# EAGLE board STM32VGT ATAS v10 (EAGLE 9.7.0)
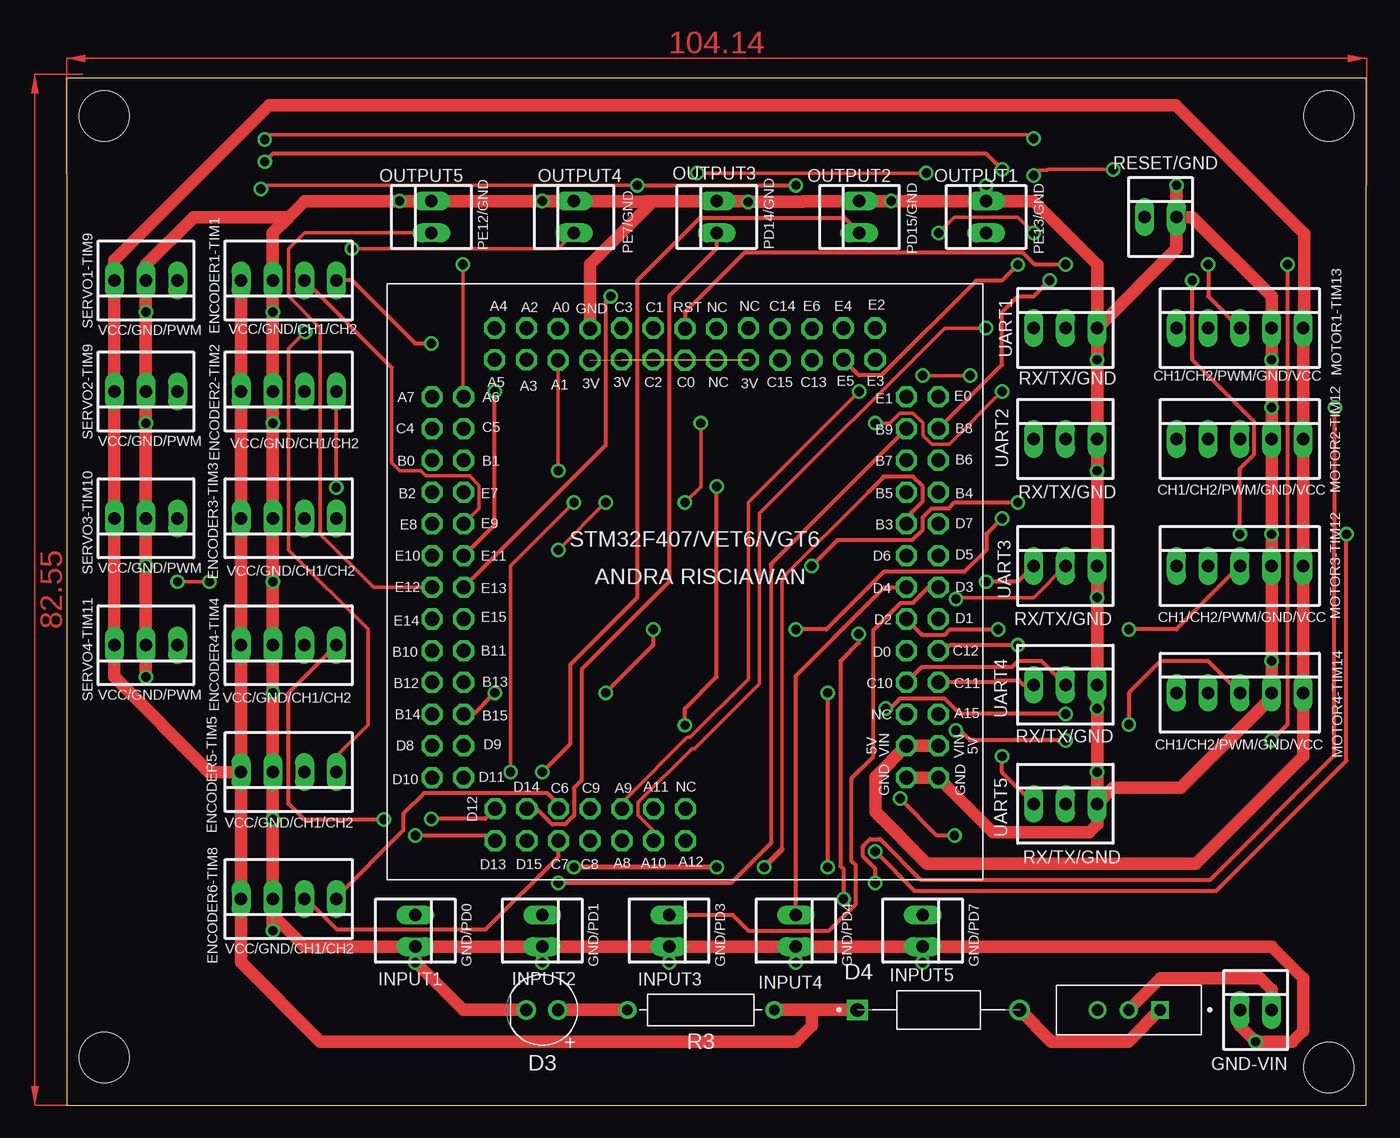
[diagram p0: board, top side]
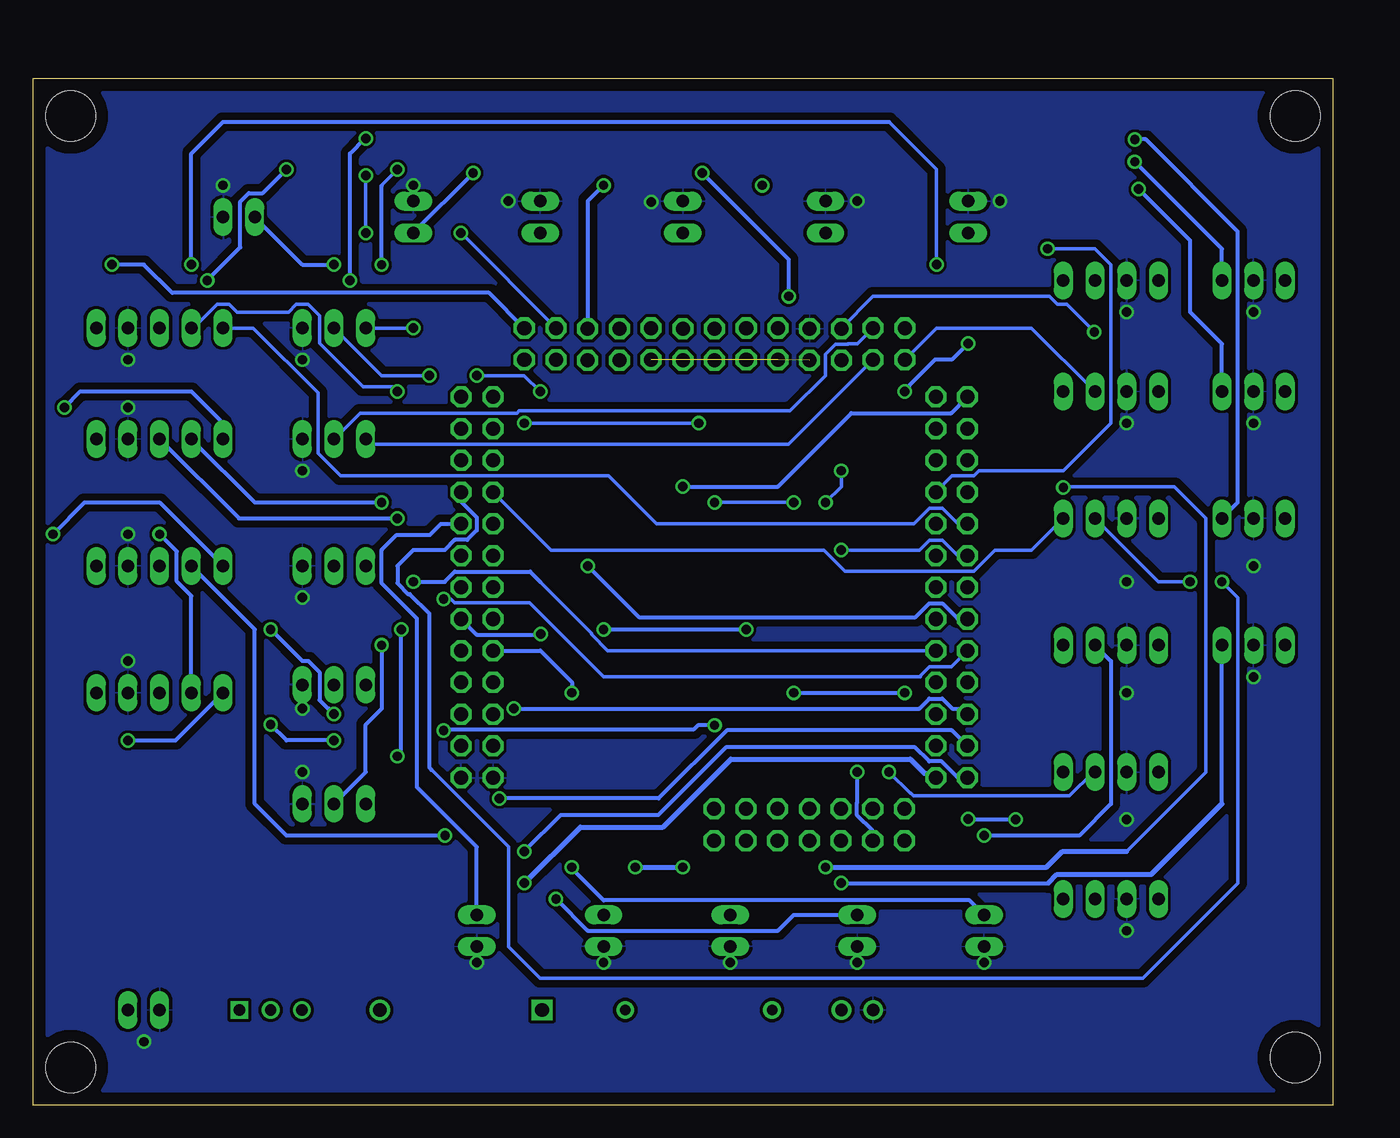
[diagram p1: board, bottom side, seen from below]

Size 104.12 x 82.22 mm. Coordinates in mm from the lower left corner, seen from the top.
Outline: 0,0 104.12,0 104.12,82.22 0,82.22 0,0
Copper layers (1*16): Top / Bottom
Stack-up Default Layer Stack: Top SilkScreen Epoxy Ink / Top SolderMask SR:Green 0.0254mm Dk 4.3 / Top Surface Finish Lead-Free 0.02mm / Top CuFoil:007 0.035mm / Dielectric-1 User Defined 1.5mm / Bottom CuFoil:007 0.035mm / Bottom Surface Finish Lead-Free 0.02mm / Bottom SolderMask SR:Green 0.0254mm Dk 4.3 / Bottom SilkScreen Epoxy Ink
Design rules: minimum copper width 0.3mm, minimum drill size 0.75mm, copper clearance wire_polygon to wire_polygon 0.6mm, copper clearance wire_polygon to pad_smd 0.25mm, copper clearance wire_polygon to via 0.25mm, copper clearance pad_smd to pad_smd 0.25mm, copper clearance pad_smd to via 0.25mm, copper clearance via to via 6mil, copper clearance smd to pad (same net) 6mil, copper clearance smd to via (same net) 6mil, copper clearance smd to smd (same net) 6mil, dimension clearance 40mil, via restrict clearance 0mil, restrict clearance 0.3mm, drill distance 0.6mm, keepout clearance 0mil
Holes 4 mm at 3.02,3.81 101.1,3.02 101.1,79.2 3.02,79.2

## Footprints (pad centres in the part's own frame; a part is rotated, then mirrored left to right if it is on the bottom)
LEDRD254W60D565H860B_R = drill 0.981 pad 1.581: A -1.27,0; C 1.27,0
DIOAD1300W80L670D310 = drill 1.1: A 6.5,0 | drill 1.1 square: C -6.5,0
22-23-2041 = drill 1 long: 1 -3.81,0; 2 -1.27,0; 3 1.27,0; 4 3.81,0
22-23-2021 = drill 1 long: 1 -1.27,0; 2 1.27,0
22-23-2051 = drill 1 long: 1 -5.08,0; 2 -2.54,0; 3 0,0; 4 2.54,0; 5 5.08,0
RESAD1176W63L850D250B = drill 0.83 pad 1.43: 1 -5.88,0; 2 5.88,0
SW_MINI-SPDT-SW = drill 0.9 square: 1 -2.5,0 | drill 0.9: 2 0,0; 3 2.5,0
22-23-2031 = drill 1 long: 1 -2.54,0; 2 0,0; 3 2.54,0
STM32F4HEAD = drill 1.125 octagon: 3V1 5.08,20.32; 3V2 -5.08,20.32; 3V3 -7.62,20.27; 5V1 17.75,-10.6; 5V2 20.29,-10.6; A0 -10.16,22.81; A1 -10.16,20.27; A2 -12.7,22.86; A3 -12.7,20.32; A4 -15.24,22.86; A5 -15.24,20.32; A6 -17.72,17.34; A7 -20.26,17.34; A8 -5.05,-18.19; A9 -5.05,-15.65; A10 -2.51,-18.19; A11 -2.51,-15.65; A12 0.03,-18.19; A15 20.29,-8.06; B0 -20.26,12.26; B1 -17.72,12.26; B2 -20.26,9.72; B3 17.75,7.18; B4 20.29,9.72; B5 17.75,9.72; B6 20.29,12.26; B7 17.75,12.26; B8 20.29,14.8; B9 17.75,14.8; B10 -20.26,-2.98; B11 -17.72,-2.98; B12 -20.26,-5.52; B13 -17.72,-5.52; B14 -20.26,-8.06; B15 -17.72,-8.06; C0 0,20.27; C1 -2.54,22.86; C2 -2.54,20.32; C3 -5.08,22.86; C4 -20.26,14.8; C5 -17.72,14.8; C6 -10.13,-15.65; C7 -10.13,-18.19; C8 -7.59,-18.19; C9 -7.59,-15.65; C10 17.75,-5.52; C11 20.29,-5.52; C12 20.29,-2.98; C13 10.16,20.27; C14 7.62,22.81; C15 7.62,20.27; D0 17.75,-2.98; D1 20.29,-0.44; D2 17.75,-0.44; D3 20.29,2.1; D4 17.75,2.1; D5 20.29,4.64; D6 17.75,4.64; D7 20.29,7.18; D8 -20.26,-10.6; D9 -17.72,-10.6; D10 -20.26,-13.14; D11 -17.72,-13.14; D12 -15.21,-15.65; D13 -15.21,-18.19; D14 -12.67,-15.65; D15 -12.67,-18.19; E0 20.29,17.34; E1 17.75,17.34; E2 15.24,22.86; E3 15.24,20.32; E4 12.7,22.86; E5 12.7,20.32; E6 10.16,22.81; E7 -17.72,9.72; E8 -20.26,7.18; E9 -17.72,7.18; E10 -20.26,4.64; E11 -17.72,4.64; E12 -20.26,2.1; E13 -17.72,2.1; E14 -20.26,-0.44; E15 -17.72,-0.44; GND1 17.75,-13.14; GND2 20.29,-13.14; GND3 -7.62,22.81; NC2 0.03,-15.65; NC3 17.75,-8.06; NC4 5.08,22.86; NC5 2.54,20.27; NC6 2.54,22.81; RST 0,22.81

## Placement (x,y rotation side)
D3  LED_RADIALRED  [LEDRD254W60D565H860B_R]  38.1,7.62 180 top
D4  1N5392  [DIOAD1300W80L670D310]  69.85,7.62 0 top
ENCODER1-TIM1  22-23-2041  [22-23-2041]  17.78,66.04 180 top
ENCODER2-TIM2  22-23-2041  [22-23-2041]  17.78,57.15 180 top
ENCODER3-TIM3  22-23-2041  [22-23-2041]  17.78,46.99 180 top
ENCODER4-TIM4  22-23-2041  [22-23-2041]  17.78,36.83 180 top
ENCODER5-TIM5  22-23-2041  [22-23-2041]  17.78,26.67 180 top
ENCODER6-TIM8  22-23-2041  [22-23-2041]  17.78,16.51 180 top
GND-VIN  22-23-2021  [22-23-2021]  95.25,7.62 0 top
INPUT1  22-23-2021  [22-23-2021]  27.94,13.97 270 top
INPUT2  22-23-2021  [22-23-2021]  38.1,13.97 270 top
INPUT3  22-23-2021  [22-23-2021]  48.26,13.97 270 top
INPUT4  22-23-2021  [22-23-2021]  58.42,13.97 270 top
INPUT5  22-23-2021  [22-23-2021]  68.58,13.97 270 top
MOTOR1-TIM13  22-23-2051  [22-23-2051]  93.98,62.23 0 top
MOTOR2-TIM12  22-23-2051  [22-23-2051]  93.98,53.34 0 top
MOTOR3-TIM12  22-23-2051  [22-23-2051]  93.98,43.18 0 top
MOTOR4-TIM14  22-23-2051  [22-23-2051]  93.98,33.02 0 top
OUTPUT1  22-23-2021  [22-23-2021]  73.66,71.12 90 top
OUTPUT2  22-23-2021  [22-23-2021]  63.5,71.12 90 top
OUTPUT3  22-23-2021  [22-23-2021]  52.07,71.12 90 top
OUTPUT4  22-23-2021  [22-23-2021]  40.64,71.12 90 top
OUTPUT5  22-23-2021  [22-23-2021]  29.21,71.12 90 top
R3  [RESAD1176W63L850D250B]  50.8,7.62 180 top
RESET/GND  22-23-2021  [22-23-2021]  87.63,71.12 0 top
S1  MINI-SPDT-SW  [SW_MINI-SPDT-SW]  85.09,7.62 180 top
SERVO1-TIM9  22-23-2031  [22-23-2031]  6.35,66.04 180 top
SERVO2-TIM9  22-23-2031  [22-23-2031]  6.35,57.15 180 top
SERVO3-TIM10  22-23-2031  [22-23-2031]  6.35,46.99 180 top
SERVO4-TIM11  22-23-2031  [22-23-2031]  6.35,36.83 180 top
U$1  [STM32F4HEAD]  49.53,39.37 0 top
UART1  22-23-2031  [22-23-2031]  80.01,62.23 0 top
UART2  22-23-2031  [22-23-2031]  80.01,53.34 0 top
UART3  22-23-2031  [22-23-2031]  80.01,43.18 0 top
UART4  22-23-2031  [22-23-2031]  80.01,33.66 0 top
UART5  22-23-2031  [22-23-2031]  80.01,24.13 0 top

## Library data of the parts
D3 = Opto-Electronic
D4 = 1N5392; AVAILABILITY: In Stock; CHECK_PRICES: https://www.snapeda.com/parts/1N5392/Onsemi/view-part/?ref=eda; DESCRIPTION: Diode 100 V 1.5A Through Hole DO-15; MF: onsemi; MP: 1N5392; PACKAGE: None; PRICE: None; SNAPEDA_LINK: https://www.snapeda.com/parts/1N5392/Onsemi/view-part/?ref=snap
ENCODER1-TIM1 ENCODER2-TIM2 ENCODER3-TIM3 ENCODER4-TIM4 ENCODER5-TIM5 ENCODER6-TIM8 = con-molex; MF: MOLEX; MPN: 22-23-2041; OC_FARNELL: 1462920; OC_NEWARK: 38C0355
GND-VIN INPUT1-INPUT5 OUTPUT1-OUTPUT5 RESET/GND = con-molex; MF: MOLEX; MPN: 22-23-2021; OC_FARNELL: 1462926; OC_NEWARK: 25C3832
MOTOR1-TIM13 MOTOR2-TIM12 MOTOR3-TIM12 MOTOR4-TIM14 = con-molex; MF: MOLEX; MPN: 22-23-2051; OC_FARNELL: 1462952; OC_NEWARK: 38C9178
R3 = Resistor; CATEGORY: Resistor; SUB-CATEGORY: Fixed
S1 = MINI-SPDT-SW; AVAILABILITY: Not in stock; CHECK_PRICES: https://www.snapeda.com/parts/MINI-SPDT-SW/Gravitech/view-part/?ref=eda; DESCRIPTION: Slide Switches MINI SPDT SWITCH; MF: Gravitech; MP: MINI-SPDT-SW; PACKAGE: None; PRICE: None; SNAPEDA_LINK: https://www.snapeda.com/parts/MINI-SPDT-SW/Gravitech/view-part/?ref=snap
SERVO1-TIM9 SERVO2-TIM9 SERVO3-TIM10 SERVO4-TIM11 UART1-UART5 = con-molex; MF: MOLEX; MPN: 22-23-2031; OC_FARNELL: 1462950; OC_NEWARK: 30C0862
U$1 = stm32header

## Nets
3V3: U$1.3V1 U$1.3V2 U$1.3V3
5V: D4.C ENCODER1-TIM1.4 ENCODER2-TIM2.4 ENCODER3-TIM3.4 ENCODER4-TIM4.4 ENCODER5-TIM5.4 ENCODER6-TIM8.4 MOTOR1-TIM13.5 MOTOR2-TIM12.5 MOTOR3-TIM12.5 MOTOR4-TIM14.5 R3.1 SERVO1-TIM9.3 SERVO2-TIM9.3 SERVO3-TIM10.3 SERVO4-TIM11.3 U$1.5V1 U$1.5V2
GND: D3.C ENCODER1-TIM1.3 ENCODER2-TIM2.3 ENCODER3-TIM3.3 ENCODER4-TIM4.3 ENCODER5-TIM5.3 ENCODER6-TIM8.3 GND-VIN.1 INPUT1.2 INPUT2.2 INPUT3.2 INPUT4.2 INPUT5.2 MOTOR1-TIM13.4 MOTOR2-TIM12.4 MOTOR3-TIM12.4 MOTOR4-TIM14.4 OUTPUT1.2 OUTPUT2.2 OUTPUT3.2 OUTPUT4.2 OUTPUT5.2 RESET/GND.2 SERVO1-TIM9.2 SERVO2-TIM9.2 SERVO3-TIM10.2 SERVO4-TIM11.2 U$1.GND1 U$1.GND2 U$1.GND3 UART1.3 UART2.3 UART3.3 UART4.3 UART5.3
N$4: D4.A S1.1
N$5: GND-VIN.2 S1.2
N$8: D3.A R3.2
PA0: ENCODER5-TIM5.1 U$1.A0
PA1: ENCODER5-TIM5.2 U$1.A1
PA2: U$1.A2 UART2.2
PA3: U$1.A3 UART2.1
PA4: U$1.A4
PA5: ENCODER2-TIM2.2 U$1.A5
PA6: MOTOR1-TIM13.3 U$1.A6
PA7: MOTOR4-TIM14.3 U$1.A7
PA8: U$1.A8
PA9: U$1.A9 UART1.2
PA10: U$1.A10 UART1.1
PA11: U$1.A11
PA12: U$1.A12
PA15: U$1.A15
PB0: U$1.B0
PB1: U$1.B1
PB2: U$1.B2
PB3: ENCODER2-TIM2.1 U$1.B3
PB4: ENCODER3-TIM3.2 U$1.B4
PB5: ENCODER3-TIM3.1 U$1.B5
PB6: U$1.B6
PB7: U$1.B7
PB8: SERVO3-TIM10.1 U$1.B8
PB9: SERVO4-TIM11.1 U$1.B9
PB10: U$1.B10 UART3.2
PB11: U$1.B11 UART3.1
PB12: U$1.B12
PB13: U$1.B13
PB14: MOTOR3-TIM12.3 U$1.B14
PB15: MOTOR2-TIM12.3 U$1.B15
PC0: U$1.C0
PC1: U$1.C1
PC2: U$1.C2
PC3: U$1.C3
PC4: U$1.C4
PC5: U$1.C5
PC6: ENCODER6-TIM8.1 U$1.C6
PC7: ENCODER6-TIM8.2 U$1.C7
PC8: U$1.C8
PC9: U$1.C9
PC10: U$1.C10 UART4.2
PC11: U$1.C11 UART4.1
PC12: U$1.C12 UART5.2
PC13: U$1.C13
PC14: U$1.C14
PC15: U$1.C15
PD0: INPUT1.1 U$1.D0
PD1: INPUT2.1 U$1.D1
PD2: U$1.D2 UART5.1
PD3: INPUT3.1 U$1.D3
PD4: INPUT4.1 U$1.D4
PD5: U$1.D5
PD6: U$1.D6
PD7: INPUT5.1 U$1.D7
PD8: MOTOR3-TIM12.2 U$1.D8
PD9: U$1.D9
PD10: MOTOR3-TIM12.1 U$1.D10
PD11: MOTOR2-TIM12.1 U$1.D11
PD12: ENCODER4-TIM4.1 U$1.D12
PD13: ENCODER4-TIM4.2 U$1.D13
PD14: OUTPUT3.1 U$1.D14
PD15: OUTPUT2.1 U$1.D15
PE0: U$1.E0
PE1: U$1.E1
PE2: MOTOR4-TIM14.1 U$1.E2
PE3: U$1.E3
PE4: MOTOR4-TIM14.2 U$1.E4
PE5: SERVO1-TIM9.1 U$1.E5
PE6: SERVO2-TIM9.1 U$1.E6
PE7: OUTPUT4.1 U$1.E7
PE8: MOTOR1-TIM13.1 U$1.E8
PE9: ENCODER1-TIM1.2 U$1.E9
PE10: MOTOR1-TIM13.2 U$1.E10
PE11: ENCODER1-TIM1.1 U$1.E11
PE12: OUTPUT5.1 U$1.E12
PE13: OUTPUT1.1 U$1.E13
PE14: MOTOR2-TIM12.2 U$1.E14
PE15: U$1.E15
RST: RESET/GND.1 U$1.RST

## Tracks (layer width: path | path; a pad name or v marks a point on that pad's centre or on a via)
3V3  (2 unrouted)
5V
  Top 1.016: 59.69,7.62 D4.C | 59.69,7.62 R3.1 | 59.69,7.62 59.69,6.35 58.42,5.08 20.32,5.08 13.97,11.43 ENCODER6-TIM8.4 ENCODER5-TIM5.4 | ENCODER5-TIM5.4 ENCODER4-TIM4.4 ENCODER3-TIM3.4 ENCODER2-TIM2.4 ENCODER1-TIM1.4 | U$1.5V2 U$1.5V1 64.77,26.26 64.77,23.49 68.93,19.33 90.45,19.33 99.06,27.94 MOTOR4-TIM14.5 MOTOR3-TIM12.5 MOTOR2-TIM12.5 MOTOR1-TIM13.5 99.13,62.3 99.13,69.78 88.83,80.08 16.22,80.08 3.81,67.66 SERVO1-TIM9.3 SERVO2-TIM9.3 SERVO3-TIM10.3 SERVO4-TIM11.3 3.81,34.29 11.43,26.67 ENCODER5-TIM5.4
GND  (via drill 0.75)
  Top 1.016: RESET/GND.2 88.9,68.58 UART1.3 | UART5.3 83.82,25.4 89.25,25.4 96.52,32.67 MOTOR4-TIM14.4 v96.52,35.56 MOTOR3-TIM12.4 v96.52,45.72 MOTOR2-TIM12.4 v96.52,55.88 v96.52,59.69 MOTOR1-TIM13.4 96.52,64.77 90.17,71.12 RESET/GND.2 | UART5.3 82.55,22.51 81.91,21.86 74.19,21.86 U$1.GND2 U$1.GND1 | INPUT5.2 INPUT4.2 | INPUT4.2 INPUT3.2 | INPUT3.2 INPUT2.2 | INPUT2.2 INPUT1.2 | INPUT1.2 19.05,12.7 16.51,15.24 | 16.51,15.24 ENCODER6-TIM8.3 | ENCODER6-TIM8.3 v16.51,22.86 ENCODER5-TIM5.3 v16.51,33.02 ENCODER4-TIM4.3 v16.51,41.91 ENCODER3-TIM3.3 v16.51,54.61 ENCODER2-TIM2.3 | ENCODER2-TIM2.3 16.51,58.42 | ENCODER2-TIM2.3 v16.51,63.5 ENCODER1-TIM1.3 16.51,69.85 17.78,71.12 | INPUT5.2 96.52,12.7 99.06,10.16 99.06,5.96 98.18,5.08 v95.25,5.08 93.98,6.35 GND-VIN.1 | 17.78,71.12 19.05,72.39 v26.67,72.39 OUTPUT5.2 v38.1,72.39 OUTPUT4.2 45.1,72.39 45.17,72.32 46.27,72.32 46.34,72.39 46.99,72.39 | 46.99,72.39 OUTPUT3.2 | OUTPUT3.2 53.34,72.39 | OUTPUT1.2 v66.04,72.39 OUTPUT2.2 59.04,72.39 58.97,72.32 v54.61,72.32 54.54,72.39 OUTPUT3.2 | OUTPUT1.2 77.47,72.39 82.55,67.31 UART1.3 | 16.51,15.24 v16.51,13.97 ENCODER6-TIM8.3 | 17.78,71.12 10.16,71.12 6.35,67.31 SERVO1-TIM9.2 v6.35,63.5 SERVO2-TIM9.2 v6.35,54.61 SERVO3-TIM10.2 v6.35,43.18 SERVO4-TIM11.2 v6.35,34.29 | INPUT5.2 v68.58,11.43 | INPUT4.2 v58.42,11.43 | INPUT3.2 v48.26,11.43 | INPUT2.2 v38.1,11.43 | INPUT1.2 v27.94,11.43 31.75,7.62 D3.C | OUTPUT1.2 v73.66,73.66 | RESET/GND.2 v88.9,73.66 | UART1.3 v82.55,59.69 UART2.3 v82.55,50.8 UART3.3 v82.55,40.64 UART4.3 v82.55,31.75 v82.55,26.67 UART5.3 | 46.99,72.39 41.93,67.33 41.93,65.78 41.91,65.76 U$1.GND3
  pour Bottom: 0,83.82 105.41,83.82 105.41,0 0,0
N$4
  Top 1.016: S1.1 85.05,5.08 78.89,5.08 D4.A
N$5
  Top 1.016: GND-VIN.2 96.52,9.24 95.6,10.16 87.63,10.16 S1.2
N$8
  Top 1.016: R3.2 D3.A
PA0  (via drill 0.75)
  Top 0.3: ENCODER5-TIM5.1 21.59,27.94 24.13,30.48 24.13,38.1 17.78,44.45 17.78,60.6 v19.11,61.93
  Bottom 0.3: U$1.A0 39.37,62.23 36.83,64.77 22.71,64.77 22.07,64.13 21.31,64.13 v19.11,61.93
PA1  (via drill 0.75)
  Top 0.3: v35.56,26.67 35.56,43.18 v40.64,48.26 | U$1.A1 v39.37,50.8
  Bottom 0.3: ENCODER5-TIM5.2 19.2,26.67 21.11,24.76 33.6,24.76 33.8,24.96 33.85,24.96 v35.56,26.67 | v39.37,50.8 39.37,49.53 v40.64,48.26
PA2
  Bottom 0.3: UART2.2 77.94,55.41 65.35,55.41 65.17,55.59 43.47,55.59 40.64,58.42 40.64,60.13 39.83,60.94 38.86,60.94 38.83,60.96 38.1,60.96 U$1.A2
PA3
  Bottom 0.3: UART2.1 77.06,52.93 43.59,52.93 U$1.A3
PA5
  Bottom 0.3: ENCODER2-TIM2.2 24.13,62.23 31.75,62.23 U$1.A5
PA6  (via drill 0.75)
  Top 0.3: v31.75,67.31 31.75,56.77 U$1.A6
  Top 0.305: MOTOR1-TIM13.3 91.44,64.77 v91.44,67.31
  Bottom 0.3: 35.56,78.74 31.75,74.93 v31.75,67.31
  Bottom 0.305: 35.56,78.74 88.9,78.74 91.44,76.2 v91.44,67.31
PA7  (via drill 0.75)
  Top 0.305: MOTOR4-TIM14.3 91.44,35.56 87.63,35.56 85.09,33.02 v85.09,30.48 | v80.01,29.21 72.39,29.21 71.61,30 v71.24,30 | v52.07,49.53 52.07,34.29 49.53,31.75 v49.53,30.42
  Bottom 0.305: v85.09,30.48 83.82,29.21 v80.01,29.21 | v52.07,49.53 44.45,49.53 38.56,55.42 30.56,55.42 U$1.A7 | v71.24,30 71.17,30.06 51.22,30.06 50.86,30.42 v49.53,30.42
PA9  (via drill 0.75)
  Top 0.3: U$1.A9 44.88,24.12 44.88,24.61 49.71,29.44 49.94,29.44 54.61,34.12 54.61,48.26 v63.5,57.15 | v68.58,58.42 v72.39,58.42
  Bottom 0.3: v63.5,57.15 64.77,58.42 v68.58,58.42 | v72.39,58.42 76.2,58.42 UART1.2
PA10  (via drill 0.75)
  Top 0.3: v73.66,62.23 70.35,62.23 55.51,47.39 55.51,33.74 50.31,28.54 50.08,28.54 45.78,24.24 45.78,23.21 47.02,21.96 U$1.A10
  Bottom 0.3: v73.66,62.23 UART1.1
PB3  (via drill 0.75)
  Top 0.3: 57.31,20.49 57.31,42.19 64.22,49.09 | ENCODER2-TIM2.1 v21.59,49.47
  Top 0.305: U$1.B3 67.67,46.94 67.67,47.44 68.57,48.35 68.57,49.56 67.8,50.34 65.46,50.34 64.22,49.09
  Top 0.406: 57.31,20.49 v55.88,19.05 | v52.07,19.05 v40.64,19.05
  Bottom 0.3: 16.51,20.32 10.16,26.67 10.16,46.99 12.7,49.53 21.53,49.53 v21.59,49.47
  Bottom 0.406: v55.88,19.05 v52.07,19.05 | v40.64,19.05 22.93,19.05 21.66,20.32 16.51,20.32
PB4  (via drill 0.75)
  Top 0.3: v11.43,41.91 v8.89,41.91
  Bottom 0.3: ENCODER3-TIM3.2 13.97,41.91 v11.43,41.91 | v8.89,41.91 7.62,40.64 7.62,17.78 15.24,10.16 63.5,10.16 66.04,12.7 66.04,20.69 72.2,26.86 72.22,26.87
  Bottom 0.305: U$1.B4 69.82,48.31 68.57,47.07 68.57,46.03 69.35,45.26 70.34,45.26 71.14,44.45 73.66,44.45 74.93,43.18 74.93,41.79 74.07,40.93 73.95,40.93 72.39,39.37 72.39,27.04 72.2,26.86
PB5
  Bottom 0.3: ENCODER3-TIM3.1 24.13,44.45 27.07,44.45 28.75,42.77 39.07,42.77 40.75,44.45 62.64,44.45 U$1.B5
PB8  (via drill 0.75)
  Top 0.3: v15.86,77.33 16.24,77.71 77.17,77.71 v77.47,77.41
  Top 0.305: U$1.B8 74.93,59.28 74.93,63.5 76.2,64.77 77.47,64.77 v78.74,66.04
  Bottom 0.305: SERVO3-TIM10.1 7.62,48.26 7.62,69.96 14.99,77.33 v15.86,77.33 | v78.74,66.04 78.74,76.2 77.53,77.41 v77.47,77.41
PB9  (via drill 0.75)
  Top 0.305: U$1.B9 56.41,43.3 56.41,20.97 53.22,17.78 v39.37,17.78
  Bottom 0.305: 8.89,24.13 SERVO4-TIM11.1 | v39.37,17.78 22.78,17.78
  Bottom 0.406: 8.89,24.13 14.55,18.47 22.09,18.47 22.78,17.78
PB10  (via drill 0.75)
  Top 0.3: UART3.2 77.47,40.64 71.36,40.64 v71.24,40.52
  Bottom 0.3: v71.24,40.52 70.63,40.52 70.33,40.23 64.36,40.23 58.42,34.29 33.05,34.29 33.05,34.36 32.33,35.09 30.57,35.09 U$1.B10
PB11  (via drill 0.75)
  Top 0.305: UART3.1 76.2,41.91 v73.66,41.91
  Bottom 0.3: 63.5,41.91 59.4,37.81 59.4,37.7 58.09,36.39 U$1.B11
  Bottom 0.305: v73.66,41.91 71.14,41.91 70.34,42.72 64.31,42.72 63.5,41.91
PB14  (via drill 0.75)
  Top 0.305: MOTOR3-TIM12.3 88.9,38.1 v85.09,38.1 | v80.01,31.32 71.57,31.32 70.34,32.56 66.76,32.56 65.96,31.75 v65.61,31.75
  Bottom 0.305: v85.09,38.1 82.56,35.57 82.07,35.57 81.17,34.67 81.17,32.43 80.49,31.75 80.44,31.75 v80.01,31.32 | v65.61,31.75 33.13,31.75 32.33,32.56 31.29,32.56 30.49,31.75 29.71,31.75 U$1.B14
PB15  (via drill 0.75)
  Top 0.305: v74.93,46.99 73.66,45.72 73.66,44.45 71.93,42.72 65.47,42.72 60.86,38.1 v58.42,38.1 | v46.99,38.1 46.99,36.83 v43.18,33.02 | v34.29,33.02 32.58,31.31 U$1.B15
  Bottom 0.305: MOTOR2-TIM12.3 87.63,46.99 v74.93,46.99 | v58.42,38.1 v46.99,38.1 | v43.18,33.02 v34.29,33.02
PC6
  Top 0.305: U$1.C6 39.4,24.1 38.52,24.98 28.62,24.98 26.96,23.33 26.96,22 21.59,16.63 ENCODER6-TIM8.1
PC7
  Top 0.305: ENCODER6-TIM8.2 19.2,16.51 21.63,14.08 33.57,14.08 39.4,19.91 U$1.C7
PC10
  Top 0.305: UART4.2 78.1,35.57 76.22,35.57 75.75,35.1 68.53,35.1 U$1.C10
PC11
  Top 0.305: UART4.1 76.63,33.66 76.29,34 74.52,34 74.37,33.85 U$1.C11
PC12  (via drill 0.75)
  Top 0.305: U$1.C12 70.21,36.78 70.71,36.78 70.76,36.83 v76.2,36.83
  Bottom 0.305: 76.31,36.72 v76.2,36.83 76.2,31.75 77.47,30.48 77.47,26.67 UART5.2
PD0  (via drill 0.75)
  Top 0.305: v60.96,33.02 v60.96,19.05
  Bottom 0.305: INPUT1.1 29.1,16.4 58.42,16.4 60.96,18.94 v60.96,19.05 | U$1.D0 63.47,36.39 60.96,33.88 v60.96,33.02
PD1  (via drill 0.75)
  Top 0.305: v62.23,16.51 62.23,18.91 61.98,19.16 61.98,35.56 63.43,37.01 v63.43,37.72
  Bottom 0.305: INPUT2.1 43.18,15.24 44.45,13.97 59.69,13.97 v62.23,16.51 | U$1.D1 68.57,37.68 63.47,37.68 v63.43,37.72
PD2  (via drill 0.75)
  Top 0.305: U$1.D2 68.53,37.68 70.34,37.68 70.75,38.1 v74.62,38.1 | UART5.1 74.93,26.67 v74.93,27.94
  Bottom 0.305: v74.62,38.1 74.62,28.25 v74.93,27.94
PD3
  Top 0.305: INPUT3.1 53.34,15.24 54.61,13.97 61.08,13.97 63.21,16.1 63.21,19.21 62.88,19.54 62.88,26.16 64.63,27.9 64.63,38.04 66.81,40.22 67.8,40.22 69.04,41.47 U$1.D3
PD4
  Top 0.305: U$1.D4 65.51,41.47 58.42,34.38 INPUT4.1
PD7
  Bottom 0.305: INPUT5.1 68.58,20.68 73.37,25.47 73.37,38.95 76.2,41.78 76.2,44.46 75,45.66 72.33,45.66 71.44,46.55 U$1.D7
PD8  (via drill 0.75)
  Top 0.305: v71.12,21.59 69.73,21.59 v66.76,24.56
  Bottom 0.305: MOTOR3-TIM12.2 86.36,38.1 86.36,24.13 83.82,21.59 v71.12,21.59 | U$1.D8 30.52,30.02 48.55,30.02 54,24.56 v66.76,24.56
PD10  (via drill 0.75)
  Top 0.305: v102.53,45.72 102.53,27.6 92.09,17.16 67.93,17.16 v64.77,20.32
  Bottom 0.305: U$1.D10 30.05,26.23 31.34,27.52 32.33,27.52 33.46,28.66 48.63,28.66 54.06,23.22 61.86,23.22 v64.77,20.32 | MOTOR3-TIM12.1 93.98,48.26 99.99,48.26 v102.53,45.72
PD11  (via drill 0.75)
  Top 0.305: v64.77,17.78 64.77,18.93 63.79,19.91 63.79,20.73 64.36,21.3 65.18,21.3 68.41,18.07 91.61,18.07 101.54,28 101.54,46.13 101.6,46.18 v101.6,55.88
  Bottom 0.305: v101.6,55.88 100.33,57.15 91.44,57.15 88.9,54.61 MOTOR2-TIM12.1
  Bottom 0.406: U$1.D11 32.15,26.57 32.72,26.57 33.86,27.7 48.23,27.7 53.66,22.27 60.28,22.27 v64.77,17.78
PD12  (via drill 0.75)
  Top 0.305: ENCODER4-TIM4.1 17.78,33.02 17.78,24.13 19.05,22.86 v25.4,22.86 | U$1.D12 33.52,22.92 v29.21,22.92
  Bottom 0.305: v29.21,22.92 29.15,22.86 v25.4,22.86
PD13  (via drill 0.75)
  Top 0.305: U$1.D13 33.91,21.59 v27.94,21.59
  Bottom 0.305: v27.94,21.59 20.32,21.59 17.78,24.13 17.78,35.56 ENCODER4-TIM4.2
PD14
  Top 0.305: OUTPUT3.1 52.07,68.58 48.26,64.77 48.26,41.92 41.25,34.91 41.25,26.02 40.64,25.4 40.64,24.24 40.65,24.24 40.65,23.2 39.92,22.47 38.88,22.47 37.64,23.72 U$1.D14
PD15  (via drill 0.75)
  Top 0.305: OUTPUT2.1 62.29,71.06 50.74,71.06 45.72,66.04 45.72,40.66 40.35,35.29 40.35,28.92 v38.1,26.67
  Bottom 0.305: U$1.D15 36.86,21.96 38.11,23.2 38.11,24.24 38.1,24.24 v38.1,26.67
PE2  (via drill 0.75)
  Top 0.305: v97.79,67.31 v97.78,67.3 97.78,30.47 v96.52,29.21
  Bottom 0.305: MOTOR4-TIM14.1 92.71,29.21 v96.52,29.21 | U$1.E2 67.58,65.04 92.97,65.04 95.24,67.31 v97.79,67.31
PE4  (via drill 0.75)
  Top 0.3: v69.85,69.85 71.12,71.12 76.2,71.12 v77.47,69.85 | v83.82,74.93 78.6,74.93 78.55,74.88 77.9,74.88 v77.47,74.45
  Top 0.305: v93.98,45.72 93.98,50.95 95.14,52.11 95.14,54.72 90.17,59.69 v90.17,66.04
  Bottom 0.3: U$1.E4 v69.85,69.85 | v77.47,69.85 v77.47,74.45
  Bottom 0.305: v93.98,45.72 92.6,44.34 92.6,41.95 91.44,40.79 MOTOR4-TIM14.2 | v90.17,66.04 87.52,68.69 87.52,72.35 86.84,73.03 85.72,73.03 v83.82,74.93
PE5  (via drill 0.75)
  Top 0.305: U$1.E5 63.48,58.44 65.29,58.44 72.87,66.03 74.93,66.03 v76.2,67.3 | v74.93,74.93 73.66,76.2 16.52,76.2 v15.86,75.55
  Bottom 0.3: v74.93,74.93 76.2,73.66
  Bottom 0.305: SERVO1-TIM9.1 8.89,68.57 v15.86,75.55 | v76.2,67.3 76.2,73.66
PE6  (via drill 0.75)
  Top 0.3: v45.72,73.66 15.86,73.66 v15.55,73.35
  Top 0.305: v45.72,73.66 v58.42,73.66
  Bottom 0.305: SERVO2-TIM9.1 8.89,60.96 11.43,63.5 11.43,69.23 v15.55,73.35 | v58.42,73.66 59.69,72.39 U$1.E6
PE7  (via drill 0.75)
  Top 0.3: v22.86,68.58 39.37,68.58 OUTPUT4.1
  Bottom 0.3: U$1.E7 30.51,50.39 28.75,50.39 28.34,50.8 21.59,50.8 17.78,54.61 17.78,67.31 19.05,68.58 v22.86,68.58
PE8
  Bottom 0.3: U$1.E8 30.05,46.55 31.3,47.79 32.33,47.79 33.57,46.55 54.17,46.55 58.01,50.39 79.48,50.39 81.28,52.18 81.28,57.04 86.47,62.23 MOTOR1-TIM13.1
PE9
  Top 0.3: U$1.E9 33.05,47.79 33.05,49.61 32.27,50.39 28.75,50.39 28.34,50.8 26.67,50.8 26.03,51.44 26.03,59.05
  Top 0.305: 26.03,59.05 ENCODER1-TIM1.2
PE10  (via drill 0.75)
  Top 0.3: v74.93,57.15 70.71,52.93 69.3,52.93 68.58,53.66 68.58,54.63 67.8,55.41 66.77,55.41 65.96,54.61 v64.77,54.61 | v50.8,54.61 50.8,49.53 v49.53,48.26 | v43.18,48.26 v39.37,44.45
  Bottom 0.3: MOTOR1-TIM13.2 91.29,62.23 89.38,64.14 88.42,64.14 87.78,63.5 83.67,63.5 83.03,64.14 82.07,64.14 81.16,63.23 81.16,61 77.69,57.52 75.3,57.52 v74.93,57.15 | v64.77,54.61 v50.8,54.61 | v49.53,48.26 v43.18,48.26 | U$1.E10 30.05,44.01 31.3,45.25 32.33,45.25 33.13,44.45 v39.37,44.45
PE11  (via drill 0.75)
  Top 0.305: ENCODER1-TIM1.1 22.86,66.04 27.9,61 v29.21,61 | v34.29,57.15 34.29,46.49 U$1.E11
  Bottom 0.305: v34.29,57.15 33.96,57.48 33.96,57.6 31.87,59.69 30.52,59.69 v29.21,61
PE12
  Top 0.3: OUTPUT5.1 19.05,69.85 17.78,68.58 17.78,64.77 20.32,62.23 20.32,45.72 24.57,41.47 U$1.E12
PE13  (via drill 0.75)
  Top 0.3: v50.51,74.64 v68.87,74.64
  Top 0.305: U$1.E13 43.18,52.84 43.18,64.35 v43.6,64.77
  Bottom 0.305: OUTPUT1.1 v68.87,74.64 | v43.6,64.77 43.6,67.73 v50.51,74.64
PE14  (via drill 0.75)
  Top 0.305: v76.2,48.26 71.12,48.26 70.66,47.8 69.3,47.8 68.57,47.07 68.57,46.08 67.75,45.26 61.77,45.26 v59.69,43.18
  Bottom 0.305: MOTOR2-TIM12.2 86.36,48.26 v76.2,48.26 | U$1.E14 30.05,38.93 31.29,40.18 32.33,40.18 33.42,39.08 55.59,39.08 v59.69,43.18
RST  (via drill 0.75)
  Top 0.305: U$1.RST 49.53,63.5 54.31,68.28 76.61,68.28 77.57,67.31 v80.01,67.31
  Bottom 0.305: 49.53,62.23 U$1.RST | RESET/GND.1 82.55,67.31 v80.01,67.31
(copper drawn outside any net)
  shapes: Top area x2

## Text on the board
NamesTop: PE12/GND | PE7/GND | PD14/GND | PD15/GND | PE13/GND | VCC/GND/PWM | VCC/GND/CH1/CH2 | CH1/CH2/PWM/GND/VCC | RX/TX/GND | VCC/GND/PWM | VCC/GND/CH1/CH2 | CH1/CH2/PWM/GND/VCC | RX/TX/GND | VCC/GND/PWM | VCC/GND/CH1/CH2 | RX/TX/GND | CH1/CH2/PWM/GND/VCC | VCC/GND/PWM | VCC/GND/CH1/CH2 | RX/TX/GND | CH1/CH2/PWM/GND/VCC | VCC/GND/CH1/CH2 | RX/TX/GND | VCC/GND/CH1/CH2 | GND/PD0 | GND/PD1 | GND/PD3 | GND/PD4 | GND/PD7